# Altium PCB EasyPay.PcbDoc (part 2 of 2)
Units mil, origin at the board's own origin, x right, y up, seen from the top; angles counter-clockwise.
Board outline 5100 x 8140 mil, 2 copper layers (Top Layer, Bottom Layer); 127 components, 95 nets, 472 pads, 94 vias.
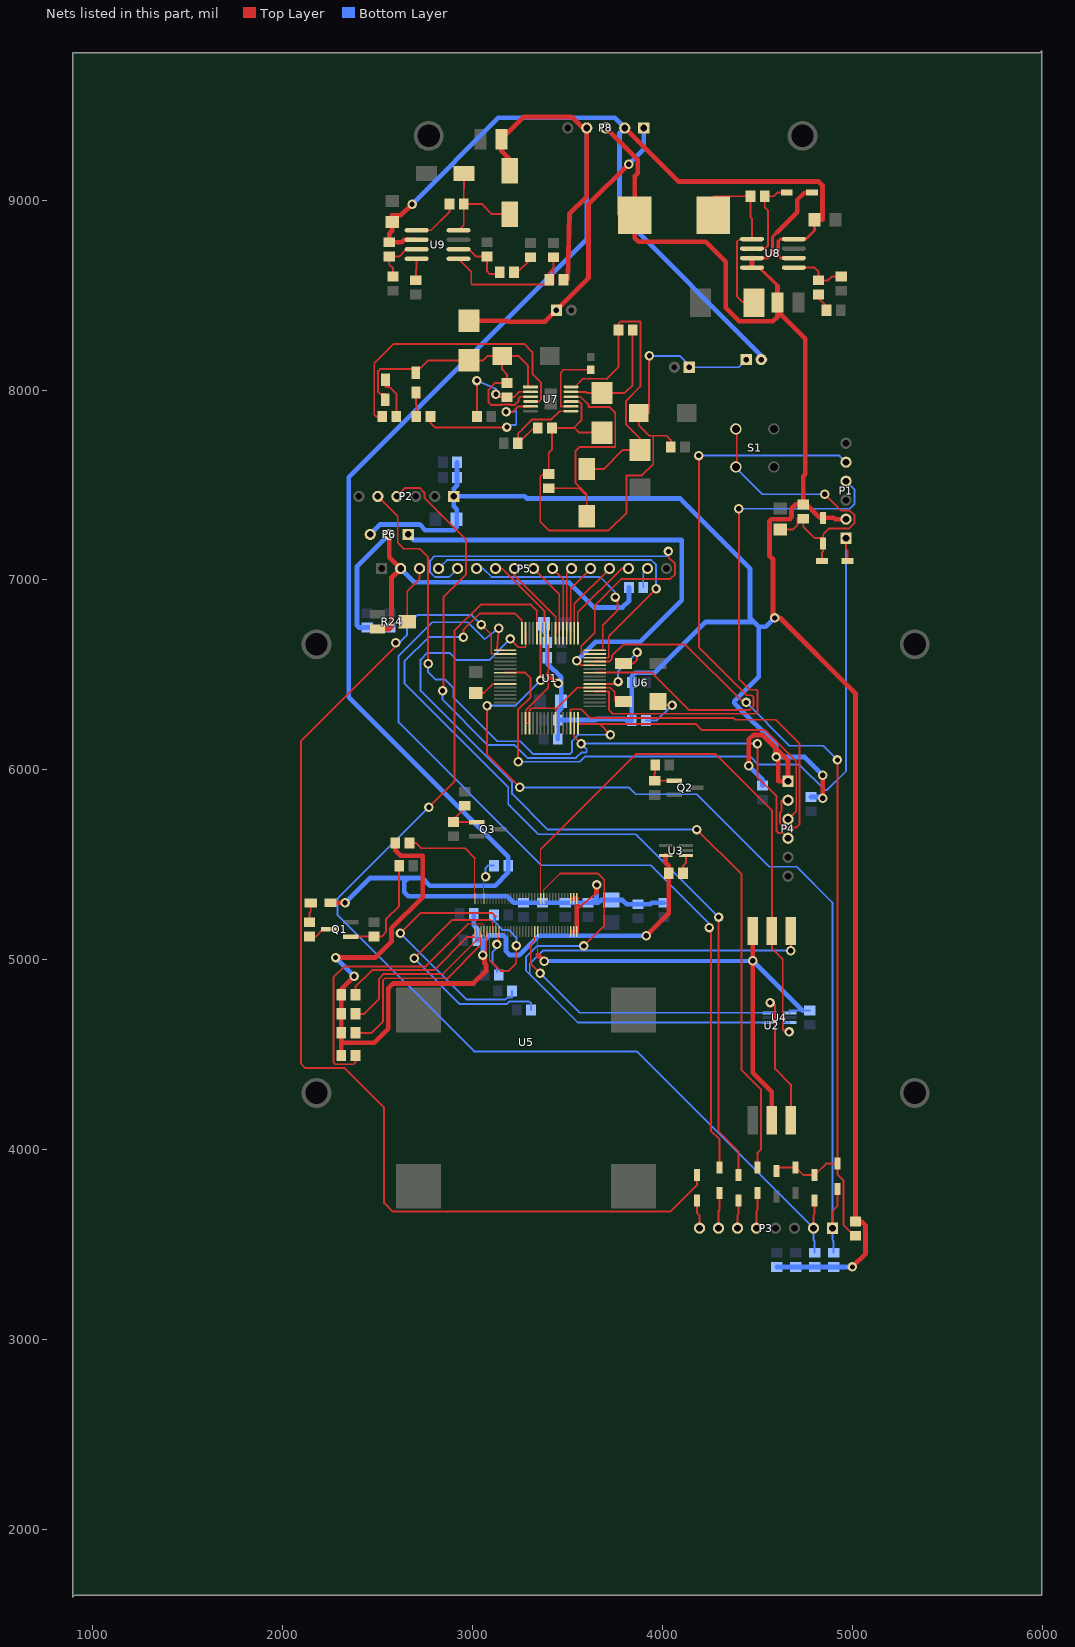
[diagram p2: the nets of this part, all layers, seen from the top]

## Via types
v1: diameter 50, hole 28, Top Layer to Bottom Layer, 94 vias

## Nets (pads, with @x,y where several pads share a name; then routed paths per layer and width w, separated by ;. In a path a pad name is that pad's centre, name@x,y a point inside that pad or via, vN(x,y) a via of type N, cw(c..) or ccw(c..) an arc to the next point about the centre after c; other vN are vias at no path point) (continued)
KEYPAD_C3: D10.2 P3.2 R22.2 U1.60 | length 5844.8
  Top Layer w7: U1.60@3337.32,6718.58 3337.32,6839
  Top Layer w10: v1(2769,5804) 2903.51,5938.51 2903.51,6731.51 3042,6870 3306.32,6870 3337.32,6839 ; P3.2@4793.94,3587.01 4793.94,3657 4800,3663.06 D10.2@4800,3733.07
  Bottom Layer w10: v1(2769,5804) 2287,5322 2287,5238 3007,4518 3862.95,4518 P3.2@4793.94,3587.01 4793.94,3525.06 4800,3519 R22.2@4800,3457.4
KEYPAD_C4: D11.2 P3.1 R23.2 U1.59 | length 5047.3
  Top Layer w10: v1(3075,6338) 3075,6080 v1(3247,5908) ; v1(3357.01,6471.01) U1.59@3357.01,6718.58 ; P3.1@4893.94,3587.01 4893.94,3677 4920,3703.06 D11.2@4920,3793.07
  Bottom Layer w10: v1(3075,6338) 3224,6338 v1(3357.01,6471.01) ; v1(3247,5908) 3820.58,5908 3856.95,5871.63 4178.37,5871.63 4560,5490 4705,5490 4893.94,5301.06 P3.1@4893.94,3587.01 4893.94,3525.06 4900,3519 R23.2@4900,3457.4
KEYPAD_R1: D7.2 U1.2 | length 6046
  Top Layer w8: v1(3045,6765) 3097,6713 3097,6610.32 U1.2@3170,6610.32
  Top Layer w10: v1(2595,6670) 2595,6651 2095,6151 2095,4454 2119,4430 2325,4430 2533,4222 2533,3720 2579,3674 4040,3674 4180,3814 D7.2@4180,3866.93
  Bottom Layer w10: v1(2595,6670) 2614,6670 2653,6709 2653,6760 2708,6815 2995,6815 v1(3045,6765)
KEYPAD_R2: D6.2 U1.1 | length 4547
  Top Layer w6.61: U1.1@3126,6630 U1.1@3170,6630 ; v1@3136,6724 v1(3136,6745)
  Top Layer w10: U1.1@3126,6630 3126.49,6634.63 v1@3136,6724 ; v1(4245,5170) 4246,5170 4254,5162 4254,4100 4300,4054 D6.2@4300,3906.93
  Bottom Layer w10: v1(3136,6745) 3062,6688 2973,6777 2786,6777 2609,6600 2609,6250 3361,5498 3936,5498 4245,5189 v1(4245,5170)
KEYPAD_R3: D5.2 U1.64 | length 4562.6
  Top Layer w7: 3222.27,6823.31 3258.58,6787 U1.64@3258.58,6718.58
  Top Layer w10: v1(2951,6699) 2951,6738 3036.31,6823.31 3222.27,6823.31 ; v1(4294,5225) 4294,4096 4400,3990 D5.2@4400,3866.93
  Bottom Layer w10: v1(2951,6699) 2767.95,6699 2640,6571.05 2640,6455.96 3186.76,5909.2 3186.76,5820 3345.76,5661 3858,5661 v1(4294,5225)
KEYPAD_R4: D4.2 U1.63 | length 4604.1
  Top Layer w7: v1(3196.77,6689.23) 3240,6646 3278.27,6646 U1.63@3278.27,6718.58
  Top Layer w10: v1(4179,5686) 4415,5450 4415,4419 4518,4316 4518,4003 4500,3985 D4.2@4500,3906.93
  Bottom Layer w10: v1(3196.77,6689.23) 3085.54,6578.01 2915.99,6578.01 2878,6616 2760,6616 2725,6581 2725,6416 3207,5934 3207,5873 3394,5686 v1(4179,5686)
LCDDB0: P5.7 U1.58 | length 467.8
  Top Layer w10: P5.7@3120,7060 3154.26,7060 3376.69,6837.57 U1.58@3376.69,6718.58
LCDDB1: P5.8 U1.55 | length 430.8
  Top Layer w7: U1.55@3435.75,6718.58 3435.75,6807.36
  Top Layer w10: P5.8@3220,7060 3220,7023.11 3435.75,6807.36
LCDDB2: P5.9 U1.54 | length 397.5
  Top Layer w7: U1.54@3455.43,6718.58 3455.43,6924.57
  Top Layer w10: P5.9@3320,7060 3455.43,6924.57
LCDDB3: P5.10 U1.53 | length 364.2
  Top Layer w7: U1.53@3475.12,6718.58 3475.12,7004.88
  Top Layer w10: P5.10@3420,7060 3475.12,7004.88
LCDDB4: P5.11 U1.52 | length 351.9
  Top Layer w7: U1.52@3494.8,6718.58 3494.8,7034.8
  Top Layer w10: 3494.8,7034.8 P5.11@3520,7060
LCDDB5: P5.12 U1.51 | length 385.1
  Top Layer w7: U1.51@3514.49,6718.58 3514.49,6954.49
  Top Layer w10: 3514.49,6954.49 P5.12@3620,7060
LCDDB6: P5.13 U1.50 | length 418.4
  Top Layer w7: U1.50@3534.17,6718.58 3534.17,6874.17
  Top Layer w10: 3534.17,6874.17 P5.13@3720,7060
LCDDB7: P5.14 U1.49 | length 473
  Top Layer w7: U1.49@3553.86,6718.58 3553.86,6830.27 3783.59,7060
  Top Layer w10: 3783.59,7060 P5.14@3820,7060
LCDE: P5.6 U1.48 | length 1166.8
  Top Layer w6.61: U1.48@3642.44,6630 U1.48@3683,6630
  Top Layer w7: U1.48@3683,6630 3683,6762 3762,6841
  Top Layer w10: v1(3750,6910) 3752,6910 3762,6900 3762,6841
  Bottom Layer w10: P5.6@3020,7060 3055,7060 3099.53,7015.47 3670.53,7015.47 3750,6936 v1(3750,6910)
LCDR/W\: P5.5 U1.47 | length 2504.4
  Top Layer w7: 3642,6864 3642,6722 3570,6650 3570,6610.32 U1.47@3642.44,6610.32
  Top Layer w10: 3642,6864 3783,7005 4040,7005 4065,7030 4065,7085 4030,7120 v1(4030,7150)
  Bottom Layer w10: P5.5@2920,7060 2875.47,7015.47 2799.53,7015.47 2775,7040 2775,7102 2798,7125 4025,7125 4030,7130 v1(4030,7150)
LCDRS: P5.4 U1.46 | length 1839.5
  Top Layer w7: U1.46@3642.44,6590.63 3715,6590.63 3715,6703 v1(3965,6953)
  Bottom Layer w10: P5.4@2820,7060 2865,7105 3940,7105 3965,7080 v1(3965,6953)
M\C\L\R\: D3.2 P1.1 U1.7 | length 3815.8
  Top Layer w10: U1.7@3170,6511.89 3275.78,6511.89 3304,6483.67 3304,6383.14 3238.86,6318 v1(3238.86,6042.81) ; P1.1@4965,7220 4965,7162.93 4971.93,7156 D3.2@4971.93,7100
  Bottom Layer w10: v1(3238.86,6042.81) 3562.99,6042.81 3591.18,6071 4461,6071 4504.09,6027.91 4720,6027.91 4854.9,5893 4864,5893 4965,5994 P1.1@4965,7220
NetBT1_1: BT1.1 C40.1 C41.2 D17.1 R31.1 R32.1 S2.1 U7.9 | length 3321
  Top Layer w9.65: U7.9@3517.4,7939.29 3560,7939.29 3572,7927.29 3572,7840
  Top Layer w10: 3572,7840 3532,7800 ; D17.1@3680,7775.67 3560.33,7775.67 3536,7800 3532,7800 ; v1(3930,8180) 3931,8179 3931,8148 3927,8144 3927,7880 C40.1@3874.02,7880 3874.02,7814 3929.02,7759 3950,7759 ; C41.2@4042.6,7700 4042.6,7736.4 4020,7759 ; 3532,7800 R32.1@3417.4,7800 3417.4,7687.4 3400,7670 R31.1@3400,7557.4 3370,7557.4 3355,7542.4 3355,7306 3400,7261 3716,7261 3810,7355 3810,7550 3890,7550 3950,7610 3950,7759 ; 3950,7759 4020,7759 ; 3950,7759 4020,7759
  Bottom Layer w10: v1(3930,8180) 4090,8180 4145,8125 BT1.1@4147.5,8122.5 ; BT1.1@4140,8120 4400,8120 S2.1@4440,8160
NetC2_1: C2.1 U5.44 | length 236.4
  Top Layer w6: v1@3137.56,5091.56 U5.44@3137.56,5148.86
  Top Layer w10: v1(3127,5081) v1@3137.56,5091.56
  Bottom Layer w10: C2.1@3126.93,4935.47 3126.93,4960.07 3104.45,4982.55 3104.45,5041.45 3127,5064 v1(3127,5081)
NetC3_1: C3.1 U5.43 | length 1406.2
  Top Layer w6: U5.43@3121.81,5148.86 3121.81,5227.16
  Top Layer w10: v1(2619,5140) 2726,5247 3101.97,5247 3121.81,5227.16
  Bottom Layer w10: v1(2619,5140) 2969,4790 3171.53,4790 3181.54,4800 3206.93,4800 C3.1@3206.93,4835.47
NetC4_1: C4.1 U5.42 | length 1311.4
  Top Layer w6: 3092,5210 3106.06,5195.94 U5.42@3106.06,5148.86
  Top Layer w10: v1(2691,5008) 2893,5210 3092,5210
  Bottom Layer w10: v1(2691,5008) 2932,4767 3178,4767 3191,4780 3296.93,4780 3306.93,4770 C4.1@3306.93,4735.47
NetC14_1: C14.1 D2.1 D3.1 R18.2 S1.2 S1.4 | length 1633.7
  Top Layer w10: S1.4@4390,7595 S1.2@4390,7795 ; C14.1@4620,7264.88 4685.21,7264.88 4708.72,7288.39 4708.72,7322.6 R18.2@4740,7322.6 4740,7280 4799,7221 D2.1@4845,7221 ; D3.1@4838.07,7100 4838.07,7143 4845,7149.93 D2.1@4845,7193.07 D2.1@4845,7221 ; v1(4853,7451) 4939,7365 4985,7365 5010,7340 5010,7300 4980,7270 4875,7270 4845,7240 D2.1@4845,7221
  Bottom Layer w10: S1.4@4387.5,7587.5 4524,7451 v1(4853,7451)
NetC35_1: C35.1 D12.2 D14.1 D15.1 R27.1 U7.1 U7.3 | length 1770
  Top Layer w9.65: 3249.88,7964.88 U7.3@3304.8,7964.88 ; 3290,8130 3290,8016.06 U7.1@3304.8,8016.06
  Top Layer w10: D15.1@2540,7948.82 2540,7978 2513,7978 2501,7990 2501,8100 2512,8111 2700,8111 D14.1@2700,8091.18 2764.49,8155.67 D12.2@2980,8155.67 3054,8155.67 3078.33,8180 C35.1@3154.02,8180 ; 3249.88,7964.88 3240,7955 3240,7940 3222,7922 3201.74,7922 3199.73,7924.01 3150.27,7924.01 3148.26,7922 3096.81,7922 3082,7936.81 3082,8000 3119.4,8037.4 R27.1@3180,8037.4 3180,8083.02 3154.02,8109 C35.1@3154.02,8180 ; 3290,8130 3240,8180 C35.1@3154.02,8180
NetC36_1: C36.1 D17.2 U7.11 | length 634.2
  Top Layer w10: U7.11@3517.4,7990.47 3595,7990.47 3601.14,7984.33 D17.2@3680,7984.33 3800,7984.33 3841.89,8026.22 C36.1@3841.89,8316.06
NetC36_2: C36.2 D13.2 L1.1 U7.12 | length 1710.1
  Top Layer w9.65: U7.12@3517.4,8016.06 3550,8016.06 3550,8029 3580,8059 3706.09,8059
  Top Layer w10: L1.1@3600,7584.02 3689,7584.02 3789.31,7684.33 D13.2@3880,7684.33 3880,7745 3807,7818 3807,7943 3883,8019 3883,8360.59 3777.68,8360.59 3767.09,8350 C36.2@3767.09,8316.06 3767.09,8120 3706.09,8059
NetC38_1: C38.1 D18.2 U8.2 | length 481.9
  Top Layer w10: U8.2@4469.76,8745 4540,8745 4554,8759 4554,8946 4537.4,8962.6 C38.1@4537.4,9020 4585,9020 4605,9040 D18.2@4653.07,9040
NetC38_2: C38.2 D16.2 L2.2 U8.1 | length 1001.4
  Top Layer w10: L2.2@4266.69,8920 4266.69,9020 C38.2@4462.6,9020 4462.6,8910.17 4469.76,8903 U8.1@4469.76,8795 4406,8795 4391,8780 4391,8493 4420,8464 4480.49,8464 D16.2@4480.49,8460
NetC42_2: C42.2 R33.1 U8.5 | length 313.9
  Top Layer w10: U8.5@4690.24,8645 4800,8645 4820,8625 R33.1@4820,8577.4 4870,8577.4 4890,8597.4 C42.2@4940,8597.4
NetC43_2: C43.2 R33.2 | length 100.2
  Top Layer w10: R33.2@4820,8502.6 4820,8482.6 4862.6,8440 C43.2@4862.6,8420
NetC44_1: C44.1 U9.1 | length 255.1
  Top Layer w10: U9.1@2704.25,8841.06 2780,8841.06 2877.6,8938.66 C44.1@2877.6,8980
NetC44_2: C44.2 D19.2 L3.1 U9.8 | length 575.9
  Top Layer w10: U9.8@2924.72,8841.06 2952.4,8868.74 C44.2@2952.4,8980 ; D19.2@2953.43,9140 2953.43,9060.02 2952.4,9059 C44.2@2952.4,8980 ; L3.1@3195,8925.83 3100.17,8925.83 3046,8980 C44.2@2952.4,8980
NetC46_1: C46.1 R37.1 | length 125.5
  Top Layer w10: C46.1@3232.4,8603 3232.4,8617.4 3304.49,8689.49 R37.1@3304.49,8698.66
NetC46_2: C46.2 C48.2 U9.6 | length 332.6
  Top Layer w10: U9.6@2924.72,8741.06 2980,8741.06 3018.47,8702.6 C48.2@3075,8702.6 3075,8625 3090,8610 3142.6,8610 C46.2@3157.6,8610
NetC47_2: C47.2 U9.4 | length 115.4
  Top Layer w10: C47.2@2700,8577.4 2700,8632 2704.25,8636.25 U9.4@2704.25,8691.06
NetD1_2: D1.2 R4.1 | length 105.4
  Top Layer w10: R4.1@2140,5197.4 2140,5245 2146.85,5251.85 D1.2@2146.85,5300
NetD4_1: D4.1 P3.5 | length 188.6
  Top Layer w10: P3.5@4493.94,3587.01 4493.94,3677 4500,3683.06 D4.1@4500,3773.07
NetD5_1: D5.1 P3.6 | length 148.6
  Top Layer w10: P3.6@4393.94,3587.01 4393.94,3657 4400,3663.06 D5.1@4400,3733.07
NetD6_1: D6.1 P3.7 | length 188.6
  Top Layer w10: P3.7@4293.94,3587.01 4293.94,3677 4300,3683.06 D6.1@4300,3773.07
NetD7_1: D7.1 P3.8 | length 151.8
  Top Layer w10: D7.1@4180,3733.07 4180,3666.94 4193.94,3653 P3.8@4193.94,3587.01
NetD14_2: D14.2 R29.1 | length 127.9
  Top Layer w10: D14.2@2700,7986.85 2700,7924.6 2702.6,7922 R29.1@2702.6,7860
NetD15_2: D15.2 R30.1 | length 230
  Top Layer w10: D15.2@2540,8053.15 2540,8015 2562.4,8015 2597.4,7980 R30.1@2597.4,7860
NetP5_3: P5.3 R24.3 | length 307
  Top Layer w10: R24.3@2654.8,6780 2654.8,6940.81 2720,7006.01 P5.3@2720,7060
NetP5_15: P5.15 R25.2 | length 109.4
  Bottom Layer w10: R25.2@3897.4,6960 3897.4,7037.4 P5.15@3920,7060
NetQ1_1: Q1.1 R5.1 R7.2 | length 573.9
  Top Layer w10: Q1.1@2357.09,5122.6 R7.2@2480,5122.6 2520,5122.6 2544,5146.6 2544,5215 2612.13,5283.13 R5.1@2612.13,5495.47
NetQ1_3: Q1.3 R4.2 | length 118.4
  Top Layer w10: R4.2@2140,5122.6 2172,5122.6 2209.4,5160 Q1.3@2242.91,5160
NetQ2_1: Q2.1 R14.1 R16.2 | length 186.6
  Top Layer w10: R14.1@3960.08,6025.47 3960.08,5984.6 3957.48,5982 R16.2@3957.48,5942.87 Q2.1@4060.39,5942.87
NetQ3_1: Q3.1 R15.1 R17.2 | length 233
  Top Layer w10: R15.1@2957.95,5810.47 2957.95,5797 2897.95,5737 R17.2@2897.95,5725.28 Q3.1@3020.87,5725.28
NetR1_1: R1.1 U3.1 | length 100.9
  Top Layer w10: R1.1@4106.93,5455.47 4106.93,5494 4122.68,5509.75 U3.1@4122.68,5549.88
NetR6_1: R6.1 U5.41 | length 653.8
  Top Layer w6: 3089.93,4997 3089.93,5098.07 3090.32,5098.45 U5.41@3090.32,5148.86
  Top Layer w10: 3089.93,4997 3146.93,4940 3186.05,4940 3229,4982.95 3229,5074 v1(3230,5075)
  Bottom Layer w10: R6.1@3112.13,5235.47 3112.13,5201.87 3158,5156 3191.31,5156 3230,5117.31 v1(3230,5075)
NetR8_2: R8.2 U5.32 | length 213.3
  Top Layer w6: U5.32@3058.82,5323.07 v1@3058.82,5429.82
  Top Layer w10: v1@3058.82,5429.82 v1(3067,5438)
  Bottom Layer w10: v1(3067,5438) 3067,5482.47 3080,5495.47 R8.2@3112.13,5495.47
NetR9_1: R9.1 U5.39 | length 1552
  Top Layer w6: 2977,5190 3048.82,5190 3058.82,5180 U5.39@3058.82,5148.86
  Top Layer w10: R9.1@2381.93,4495.47 2381.93,4460 2371.93,4450 2276,4450 2266,4460 2266,4907 2324.64,4965.64 2752.64,4965.64 2977,5190
NetR10_1: R10.1 U5.38 | length 1049.8
  Top Layer w6: 3043.07,5079 U5.38@3043.07,5148.86
  Top Layer w10: R10.1@2381.93,4615.47 2468,4615.47 2527,4674.47 2527,4891 2539,4903 2867.07,4903 3043.07,5079
NetR11_1: R11.1 U5.37 | length 909.9
  Top Layer w6: 3027.32,5110 U5.37@3027.32,5148.86
  Top Layer w9: 2842.73,4925.41 3027.32,5110
  Top Layer w10: R11.1@2381.93,4715.47 2428.47,4715.47 2506.69,4793.69 2506.69,4900 2532.1,4925.41 2842.73,4925.41
NetR12_1: R12.1 U5.36 | length 808.4
  Top Layer w6: 3011.58,5120.3 U5.36@3011.58,5148.86
  Top Layer w10: R12.1@2381.93,4815.47 2381.93,4857.46 2470.1,4945.64 2796.56,4945.64 2971.22,5120.3 3010.9,5120.3
NetR13_2: R13.2 U5.35 | length 590.4
  Top Layer w6: U5.35@3011.58,5323.07 3011.58,5535.9
  Top Layer w10: R13.2@2666.93,5615.47 2700,5615.47 2728,5587.47 2960,5587.47 3011.58,5535.9
NetR19_2: R19.2 U6.1 | length 252
  Top Layer w10: U6.1@3975,6360 3995,6340 v1(4049,6340)
  Bottom Layer w10: R19.2@3912.4,6260 3969,6260 v1(4049,6340)
NetR27_2: R27.2 R28.1 U7.2 | length 528.6
  Top Layer w9.65: 3217,7962.6 3244.87,7990.47 U7.2@3304.8,7990.47
  Top Layer w10: v1(3022,8050) 3022,7860 R28.1@3022.6,7860 ; v1(3122,7977) 3136.4,7962.6 R27.2@3180,7962.6 3217,7962.6
  Bottom Layer w10: v1(3022,8050) 3122,8005 v1(3122,7977)
NetR29_2: R29.2 U7.5 | length 768.4
  Top Layer w9.65: v1(3175,7885) 3210.21,7885 3238.91,7913.7 U7.5@3304.8,7913.7
  Top Layer w10: R29.2@2777.4,7860 2777.4,7825.6 2800,7803 3178,7803 v1(3180,7805)
  Bottom Layer w9.65: v1(3175,7885) 3215,7885 3220.9,7890.9 3225.48,7890.9 3228.56,7887.83 3228.56,7820.67 3222.88,7815 3190,7815 v1(3180,7805)
NetR30_2: R30.2 U7.4 | length 1536.5
  Top Layer w9.65: U7.4@3304.8,7939.29 3348.29,7939.29 3359,7950 3359,8040
  Top Layer w10: R30.2@2522.6,7860 2491,7860 2481,7870 2481,8140 2584,8243 3271,8243 3314,8200 3314,8085 3359,8040
NetR32_2: R32.2 R34.1 U7.7 | length 534.2
  Top Layer w9.65: 3413.89,7845 3457,7888.11 U7.7@3517.4,7888.11
  Top Layer w10: R34.1@3237.4,7720 3237.4,7722.6 3237.6,7722.6 R34.1@3255,7740 ; R32.2@3342.6,7800 3320,7800 3260,7740 R34.1@3255,7740 ; 3413.89,7845 3312.17,7845 3262,7794.83 3262,7794.67 3240.33,7773 3240.17,7773 3237.4,7770.23 R34.1@3237.4,7740 ; R34.1@3237.4,7740 R34.1@3255,7740 ; R34.1@3237.4,7740 R34.1@3255,7740
NetR35_2: R35.2 R38.1 U9.5 | length 884
  Top Layer w10: U9.5@2924.72,8691.06 2992,8623.79 2992,8560 2997,8555 3402.6,8555 3419.49,8555 3423.54,8559.06 3424.49,8560 3424.49,8580 3424.49,8641.89 ; R35.2@3397.6,8560 3397.6,8580 3397.6,8615 3424.49,8641.89 ; 3424.49,8641.89 R38.1@3424.49,8698.66 3424.49,8641.89
NetR36_2: R36.2 R39.1 U9.3 | length 273.7
  Top Layer w10: R39.1@2580,8597.4 2580,8640 2560,8660 R36.2@2560,8702.6 2612,8702.6 2650.47,8741.06 U9.3@2704.25,8741.06
NetU1_39: U1.39 U6.3 | length 443.4
  Top Layer w10: U1.39@3642.44,6452.84 3752.84,6452.84 v1(3765,6465) ; U6.3@3793.9,6560 3845,6560 3865,6580 v1(3865,6620)
  Bottom Layer w10: v1(3765,6465) 3765,6520 v1(3865,6620)
NTC: RT1.1 U7.8 | length 395.7
  Top Layer w9.65: 3463,8092 3463,7913.7 U7.8@3517.4,7913.7
  Top Layer w10: 3463,8092 3477.54,8106.54 RT1.1@3620,8106.54
PGC: P1.5 U1.42 | length 3167.4
  Top Layer w10: U1.42@3642.44,6511.89 3943.11,6511.89 4140,6315 4456,6315 4477,6336 4477,6384 4468,6393 4442,6393 4190,6645 v1(4190,7655)
  Bottom Layer w10: v1(4190,7655) 4930,7655 P1.5@4965,7620
PGD: P1.4 U1.37 | length 2854.8
  Top Layer w10: U1.37@3642.44,6413.47 3716,6413.47 3716.69,6412.77 3716.69,6316.31 3737.73,6295.27 4489.27,6295.27 4498,6304 4498,6418.81 4495,6421.81 4459.19,6421.81 4401,6480 v1(4401,7375)
  Bottom Layer w10: v1(4401,7375) 4985,7375 5010,7400 5010,7475 P1.4@4965,7520
RFIDRX: P2.4 P4.4 U1.31 | length 4042.6
  Top Layer w6.61: U1.31@3534.17,6246.14 3534.17,6174 v1(3570.17,6138) v1@3582.17,6126
  Top Layer w10: P2.4@2600,7440 2645,7485 2720,7485 2745,7460 2745,7432 2964.53,7212.47 2964.53,7029.53 2845,6910 2845,6421.33 v1(2841,6417.33) ; 3534.17,6174 v1(3570.17,6138) ; v1(4499,6138) 4499,5961 4599.47,5860.53 4599.47,5676.5 4608,5667.97 4632.03,5667.97 P4.4@4660,5640
  Bottom Layer w10: v1(2841,6417.33) 2841,6369 3080,6130 3220.07,6130 3287.26,6062.81 3542.99,6062.81 3571.18,6091 3594.83,6091 3600.17,6096.34 3600.17,6108 v1@3582.17,6126 ; v1(3570.17,6138) 3582.17,6138 v1(4499,6138)
RFIDTX: P2.5 P4.3 U1.32 | length 4080.6
  Top Layer w6.61: U1.32@3553.86,6242 U1.32@3553.86,6246.14
  Top Layer w10: P2.5@2500,7440 2605,7335 2605,7195 2636,7164 2721,7164 2765,7120 v1(2765,6558) ; v1(3725,6185) 3668,6242 ; P4.3@4660,5740 4703,5783 4703,6045 4539,6209 4206,6209 4173,6242 3668,6242 ; 3668,6242 3553.86,6242 3668,6242
  Bottom Layer w10: v1(2765,6558) 2765,6515 2804.33,6475.67 2854.33,6475.67 2897,6433 2897,6383 3129.48,6150.52 3249.55,6150.52 3317.26,6082.81 3510,6082.81 3522.99,6095.81 3522.99,6151.99 3556,6185 v1(3725,6185)
RFIDWAKEUP: P4.2 U1.30 | length 2056.2
  Top Layer w10: U1.30@3514.49,6246.14 3514.49,6319 3572,6319 3618,6273 4373,6273 4382,6264 4595,6264 4721,6138 4721,5714 4704,5697 4640,5697 4617.47,5719.53 4617.47,5774.47 4626,5783 4626,5840 P4.2@4660,5840
RSENSE: L1.2 R31.2 U7.10 | length 1256.5
  Top Layer w9.65: U7.10@3517.4,7964.88 3567.12,7964.88 3610,7922
  Top Layer w10: R31.2@3400,7482.6 3560,7482.6 3600,7442.6 ; L1.2@3600,7335.98 3600,7442.6 ; 3610,7922 3610,7910 3720,7910 3750,7880 3750,7701 3562,7701 3541,7680 3541,7509 3600,7450 3600,7442.6
SYSTEM_WAKEUP: D8.1 D9.1 D10.1 D11.1 R26.2 U1.45 | length 4493.8
  Top Layer w10: U1.45@3642.44,6570.95 3720,6570.95 3732,6582.95 3732,6600 3792,6660 4118,6660 4423,6355 v1(4439,6355) ; D8.1@4600,3886.93 4620,3906.93 D9.1@4700,3906.93 4740,3866.93 D10.1@4800,3866.93 4860,3926.93 D11.1@4920,3926.93 ; v1(4920,6052.42) D11.1@4920,3926.93 ; R26.2@5015,3547.6 5008.4,3547.6 4951,3605 4951,3839 4920,3870 D11.1@4920,3926.93
  Bottom Layer w10: v1(4439,6355) 4667,6127 4845.42,6127 v1(4920,6052.42)
USIM_CLK: U2.C3 U4.4 U5.12 | length 4190.8
  Top Layer w6: U5.12@3373.78,5323.07 3373.78,5368.7 3459.08,5454
  Top Layer w10: 3459.08,5454 3660,5454 3692,5422 3692,5180 v1(3585,5073) ; v1(4674.53,5048) U2.C3@4674.53,5151.54
  Bottom Layer w10: v1(3585,5073) 3339.33,5073 3280,5013.67 3280,4943.67 ; U4.4@4561.38,4669.88 3553.78,4669.88 3300,4923.67 ; v1(4674.53,5048) 3585,5048 3368.35,5048 3300,4979.65 3300,4923.67 ; 3280,4943.67 3300,4923.67 ; 3280,4943.67 3300,4923.67
USIM_DATA: U2.C7 U4.6 U5.56 | length 2313.8
  Top Layer w6: 3305,5080.46 3326.54,5102 U5.56@3326.54,5148.86
  Top Layer w10: 3305,5080.46 3305,4977.96 v1(3353.96,4929) ; v1(4565,4775) 4574,4775 4592,4757 4592,4425.53 4674.53,4343 U2.C7@4674.53,4155.47
  Bottom Layer w10: v1(3353.96,4929) 3561.9,4721.06 U4.6@4561.38,4721.06 4592,4721.06 4592,4757 4574,4775 v1(4565,4775)
USIM_RST: U2.C2 U4.3 U5.13 | length 3131.8
  Top Layer w6: U5.13@3358.03,5323.07 3358.03,5583.03
  Top Layer w10: 3358.03,5583.03 3858,6083 4278,6083 4574.53,5786.47 U2.C2@4574.53,5151.54 4574.53,5061 4632,5003.53 4632,4634 4646,4620 v1(4665,4620)
  Bottom Layer w10: v1(4665,4620) 4646,4620 4632,4634 4632,4669.88 U4.3@4667.68,4669.88
V_USIM: C1.2 U2.C1 U2.C6 U4.1 U5.57 | length 2795.6
  Top Layer w6: 3342.28,5026.72 U5.57@3342.28,5148.86
  Top Layer w25: 3342.28,5026.72 v1(3377,4992) ; U2.C1@4474.53,5151.54 v1(4474.53,4995) 4474.53,4405 4574.53,4305 U2.C6@4574.53,4155.47
  Bottom Layer w11.02: U4.1@4667.68,4721.06 4667.68,4732.87 4736.65,4732.87 C1.2@4774.53,4732.87
  Bottom Layer w25: v1(3377,4992) v1(4474.53,4995) 4736.65,4732.87
VBATT: C39.1 C49.2 P8.2 R36.1 S2.2 U8.6 U8.8 U9.2 | length 5130.4
  Top Layer w16.54: U8.6@4690.24,8695 4620,8695 4608,8707 4608,8783 4620,8795 U8.8@4690.24,8795 4754.37,8795 4799.37,8840 C39.1@4799.37,8896.06
  Top Layer w25: v1(2680,8978) 2622,8920 2575,8920 C49.2@2575,8884.88 2575,8838 2560,8823 R36.1@2560,8777.4 2625,8777.4 2638.66,8791.06 U9.2@2704.25,8791.06 ; P8.2@3800,9380 4082,9098 4820,9098 4841,9077 4841,8896.06 C39.1@4799.37,8896.06
  Bottom Layer w25: v1(2680,8978) 3135,9433 3747,9433 P8.2@3800,9380 3773.02,9353.02 3773.02,8926.98 4529.37,8170.63 S2.2@4540,8160
VCC: C16.2 C17.1 C18.1 C19.1 C21.2 C22.2 C23.2 C25.2 C26.2 C27.2 C29.2 C32.2 C37.2 D2.2 D18.1 L2.1 P1.2 P2.1 P4.1 P6.3 P8.3 R18.1 R19.1 R20.1 R21.1 R22.1 R23.1 R26.1 U1.18 U1.19 U1.26 U1.38 U1.57 U6.4 U8.3 U8.4 | length 17604.7
  Top Layer w6.61: U1.18@3278.27,6246.14 U1.19@3297.95,6246.14 ; 3396.38,6501.74 U1.57@3396.38,6718.58 ; 3435.75,6320 3548.9,6433.15
  Top Layer w7: U1.18@3278.27,6246.14 3278.27,6315 3396.38,6433.11 3396.38,6501.74 ; U1.19@3297.95,6246.14 3297.95,6311.9 3310,6323.95 3431.8,6323.95 3435.75,6320 U1.26@3435.75,6246.14 ; 3548.9,6433.15 U1.38@3642.44,6433.15 3723.85,6433.15 3747,6410 3747,6360 U6.4@3793.9,6360
  Top Layer w16.54: U8.4@4469.76,8645 4509,8645 4604.88,8549.12 ; U8.3@4469.76,8695 4553,8695 4578,8720 4578,8806 4602,8830
  Top Layer w22.05: 4708,9000 4748,9040 D18.1@4786.93,9040
  Top Layer w25: 3396.38,6501.74 3443.12,6455 v1(3450,6455) ; P8.3@3700,9380 3868.5,9211.5 3868.5,9141.75 3853.31,9126.56 L2.1@3853.31,8920 3853.31,8800 3873.31,8780 4227,8780 4332,8675 4332,8432 4402,8362 4580,8362 4604.88,8386.88 C37.2@4604.88,8414.12 ; v1(4453,6022) 4453,6160 4476.5,6183.5 4525.5,6183.5 ; U8.4@4469.76,8645 U8.3@4469.76,8695 ; 4602,8830 4708,8936 4708,9000 ; 4604.88,8549.12 C37.2@4604.88,8460 C37.2@4604.88,8414.12 ; v1(4843,5851) v1(4843,5971) ; P1.2@4965,7320 4907.93,7320 4901,7326.93 D2.2@4845,7326.93 4827.47,7326.93 4757,7397.4 R18.1@4740,7397.4 ; v1(4999,3382.6) 5068,3451.6 5068,3600 5045.6,3622.4 R26.1@5015,3622.4 5015,6402.5 4617.5,6800 4580,6800 4580,7110 4562,7128 4562,7310 4572,7320 4668,7320 4678,7330 4678,7375.4 4700,7397.4 R18.1@4740,7397.4 ; 4525.5,6183.5 4528.44,6183.5 4592.75,6119.19 4592.75,6116.25 ; 4525.5,6183.5 4592.75,6116.25 ; 4592.75,6116.25 4660,6049 P4.1@4660,5940 4608,5940 4608,6057 v1(4597,6068) 4592.75,6072.25 4592.75,6116.25 ; C37.2@4604.88,8414.12 4750,8269 4750,7557 4740,7547 R18.1@4740,7397.4
  Bottom Layer w25: P6.3@2460,7240 2512.03,7292.03 2720.97,7292.03 2751,7262 2900,7262 2915.12,7277.12 C17.1@2915.12,7320 2915.12,7372 2900,7387.12 P2.1@2900,7440 ; C21.2@2917.4,7620 C25.2@2917.4,7540 2917.4,7498.4 2900,7481 P2.1@2900,7440 ; C18.1@3374.88,6770 3374.88,6728.72 3392.6,6711 C22.2@3392.6,6670 C26.2@3392.6,6590 3392.6,6559.77 3465.12,6487.25 3465.12,6455 3465.12,6433 ; C23.2@3447.4,6162.34 C27.2@3447.4,6262.34 ; v1(3450,6455) 3450,6448.12 3465.12,6433 ; v1(4453,6022) 4525,5950 C32.2@4525,5917.4 ; v1(4590,6800) 4543,6753 4506,6753 ; R20.1@4600,3382.6 R21.1@4700,3382.6 R22.1@4800,3382.6 R23.1@4900,3382.6 v1(4999,3382.6) ; C29.2@4780,5857.4 4836.6,5857.4 v1(4843,5851) ; v1(4843,5971) 4746,6068 v1(4597,6068) 4597,6132 4377,6352 4377,6360 4506,6489 4506,6753 ; P2.1@2900,7440 3274.19,7440 3285,7429.19 4090.81,7429.19 4460,7060 4460,6799 4480,6779 ; C27.2@3447.4,6262.34 3647.35,6262.34 3652.51,6267.5 3800,6267.5 3807.5,6260 R19.1@3837.6,6260 C16.2@3837.6,6460 3837.6,6491.92 ; C27.2@3447.4,6262.34 3447.4,6303 3465.12,6320.72 C19.1@3465.12,6362.34 3465.12,6433 ; 3837.6,6491.92 3837.6,6492.6 3856,6511 3856.68,6511 ; 3837.6,6491.92 3856.68,6511 ; 3856.68,6511 3959,6511 4227,6779 4480,6779 ; 4480,6779 4506,6753
VCC38: C5.1 C6.2 C7.2 C8.2 C9.2 C10.2 C11.2 C45.2 D1.1 L3.2 P8.4 R8.1 R35.1 U5.1 U5.2 U5.3 U5.68 U5.69 U5.70 | length 9400
  Top Layer w6: U5.68@3515.51,5148.86 3515.51,5148 3531.26,5148 U5.69@3531.26,5148.86 ; U5.3@3515.51,5323.07 3515.51,5323 3531.26,5323 U5.2@3531.26,5323.07
  Top Layer w10: U5.1@3547.01,5323.07 3547.01,5288.52 3560,5275.53 3652,5354
  Top Layer w25: D1.1@2251.18,5300 v1(2327.5,5300) ; L3.2@3195,9154.17 3195,9214 3150.12,9258.88 C45.2@3150.12,9320 3268.12,9438 3521,9438 3579,9380 P8.4@3600,9380 3600,9018 3509,8927 3499.65,8583.87 3485.99,8570.93 R35.1@3485,8570 ; U5.69@3531.26,5148.86 U5.70@3547.01,5148.86 3547.01,5288.52 ; U5.2@3531.26,5323.07 U5.1@3547.01,5323.07 ; 3652,5354 v1(3652,5394)
  Bottom Layer w25: v1(2327.5,5300) 2458,5430.5 2659.5,5430.5 ; P8.4@3600,9380 3600,8793 2347,7540 2347,6382.41 3186.93,5542.48 R8.1@3186.93,5495.47 3186.93,5460 3117.43,5390.5 2774.5,5390.5 2734,5431 2660,5431 ; v1(3652,5394) 3652,5327.93 C6.2@3624.54,5300.47 ; C11.2@4007.01,5300.47 3941.6,5300.47 3934,5292.87 C10.2@3869.53,5292.87 3809.65,5292.87 3788,5314.53 C5.1@3729.53,5314.53 3675.06,5314.53 3661,5300.47 C6.2@3624.54,5300.47 ; 2659.5,5430.5 2660,5431 ; 2659.5,5430.5 2639,5410 2639,5355.5 2660,5334.5 3181.93,5334.5 3215.96,5300.47 C9.2@3267.01,5300.47 C8.2@3367.01,5300.47 C7.2@3487.01,5300.47 C6.2@3607.01,5300.47 C6.2@3624.54,5300.47 ; 2659.5,5430.5 2660,5431
VCCLCD: C30.2 C33.2 P5.2 P6.2 R24.2 R25.1 | length 2711.2
  Top Layer w25: R24.2@2497.32,6740.63 2560,6740.63 2572,6752.63 2572,7012 P5.2@2620,7060 2560,7120 P6.2@2560,7240
  Bottom Layer w25: P6.2@2560,7240 2391,7071 2391,6760 2401.39,6749.61 C30.2@2443.94,6749.61 C33.2@2563.94,6749.61 ; P5.2@2620,7060 2692.03,6987.97 3504.07,6987.97 3637.04,6855 3788,6855 3822.6,6889.6 R25.1@3822.6,6960
VCCLCD_PIC: P6.1 U1.44 | length 2559.3
  Top Layer w7: v1(3547,6575) 3570.74,6551.26 U1.44@3642.44,6551.26
  Bottom Layer w25: P6.1@2660,7240 2690,7210 4100,7210 4100,6893.27 3881.06,6674.33 3646.33,6674.33 v1(3547,6575)
VCHARGE: D12.1 P7.1 P8.1 | length 1637.2
  Top Layer w25: D12.1@2980,8364.33 3180,8364.33 3184.33,8360 3380,8360 P7.1@3440,8420 3609,8589 3609,8977 v1(3821,9189)
  Bottom Layer w25: v1(3821,9189) 3900,9268 P8.1@3900,9380
VDDCORE: C15.1 U1.10 | length 174.9
  Top Layer w8: 3106.95,6452.84 U1.10@3170,6452.84
  Top Layer w10: C15.1@3015,6404.88 3059,6404.88 3106.95,6452.84
VREG_AUX: C12.2 C13.2 R1.2 R9.2 R10.2 R11.2 R12.2 R13.1 U3.5 U5.40 | length 4678
  Top Layer w6: 3074.57,5099.83 U5.40@3074.57,5148.86
  Top Layer w8: 3069.86,5095.12 3074.57,5099.83
  Top Layer w10: 3069.86,4974.14 3069.86,5025 3069.86,5095.12
  Top Layer w25: v1(2277.22,5011.66) 2487.66,5011.66 2571.5,5095.5 2571.5,5165.5 2736,5330 2736,5548 2620,5548 2592.13,5575.87 R13.1@2592.13,5615.47 ; R9.2@2307.13,4495.47 2307.13,4575.87 ; v1(2375,4913.87) 2307.13,4846 R12.2@2307.13,4815.47 R11.2@2307.13,4715.47 R10.2@2307.13,4615.47 2307.13,4575.87 ; v1(3052,5025) 3062,5015 3062,4982 3069.86,4974.14 3069.86,4941.73 3003.53,4875.39 2580,4875.39 2555,4850.39 2555,4638 2480,4563 2320,4563 2307.13,4575.87 ; v1(3914,5126) 4032.13,5244.13 R1.2@4032.13,5455.47 4032.13,5494 4015,5511.13 4015,5548.5 U3.5@4016.38,5549.88
  Bottom Layer w25: v1(2277.22,5011.66) v1(2375,4913.87) ; C13.2@3004.41,5243.07 3004.41,5183 3024.41,5163 C12.2@3024.41,5103.07 3052,5103.07 ; v1(3052,5025) 3052,5103.07 ; v1(3914,5126) 3346,5126 3245,5025 3195,5025 3175,5045 3175,5113.5 3160,5128.5 3087.43,5128.5 3062,5103.07 3052,5103.07
pads on no net: P1.6 P4.5 U1.8 U1.11 U1.12 U1.13 U1.14 U1.15 U1.16 U1.17 U1.21 U1.22 U1.23 U1.24 U1.27 U1.28 U1.29 U1.33 U1.34 U1.35 U1.36 U1.40 U1.43 U4.5 U5.7 U5.8 U5.9 U5.11 U5.14 U5.15 U5.16 U5.17 U5.18 U5.19 U5.21 U5.22 U5.23 U5.24 U5.25 U5.26 U5.27 U5.28 U5.30 U5.31 U5.33 U5.34 U5.46 U5.47 U5.48 U5.49 U5.50 U5.51 U5.52 U5.53 U5.54 U5.55 U5.59 U5.60 U5.61 U5.62 U5.63 U5.65

## Keep-outs
Keep-Out Layer:
  lines w10: 2050,9105 2050,8810 2055,8805 2405,8805 2410,8800 2410,7670 2055,7670 2055,3980 2410,3980 2410,3050 2615,3050 4900,3050 ; 2055,4190 2290,4190 2290,4410 2055,4410 ; 2055,6550 2290,6550 2290,6775 2055,6775 ; 2055,9105 2405,9105 2405,9475 2415,9475 5090,9475 5090,9105 5445,9105 ; 4895,3050 5100,3050 5100,3980 5445,3980 5445,7665 5095,7665 5095,8805 5450,8805 5450,9105 ; 5445,4185 5215,4185 5215,4410 5445,4410 ; 5445,6550 5215,6550 5215,6770 5445,6770 ; 2655,9225 2880,9225 2880,9450 2655,9450 2655,9225 ; 4625,9225 4850,9225 4850,9450 4625,9450 4625,9225

## Silkscreen, mask and mechanical layers (free items; w line width, h text height)
Top Overlay:
  lines w10: 5504,8748 5150,8748 5150,7724 5504,7724 5504,3925 5150,3925 5150,3000 4834,3000 2669,3000 2354,3000 2354,3925 2000,3925 2000,7724 2354,7724 2354,8748 2000,8748 2000,9161 2354,9161 2354,9535 5150,9535 5150,9161 5504,9161 ; 5505,8748 5505,9158
  text "Nnoduka Eruchalu" at 5135,4905 h60 r90
  text "EasyPay (Striving Link Ltd)" at 5270,4900 h60 r90
  text "April 09, 2013" at 5390,4895 h60 r90
Drill Drawing:
  text ".LEGEND" at 5704,3200 h60
  text "Drill Drawing." at 5704,3100 h60

## Dimensions
2354,3000 to 2000,3925 on Drill Drawing
2000,3925 to 2354,3000 on Drill Drawing
1220,3000 to 2000,8748 on Drill Drawing

## Text inside footprints (layer, text, board x,y; h text height)
BT1: Bottom Overlay "+" at 4270,8095 h45.28
P7: Top Overlay "+" at 3310,8395 h45.28
S2: Top Overlay "+" at 4310,8135 h45.28